# EAGLE board basic_sensor gpio_parallel_v1.2_3v3BOOST (EAGLE 8.1.1)
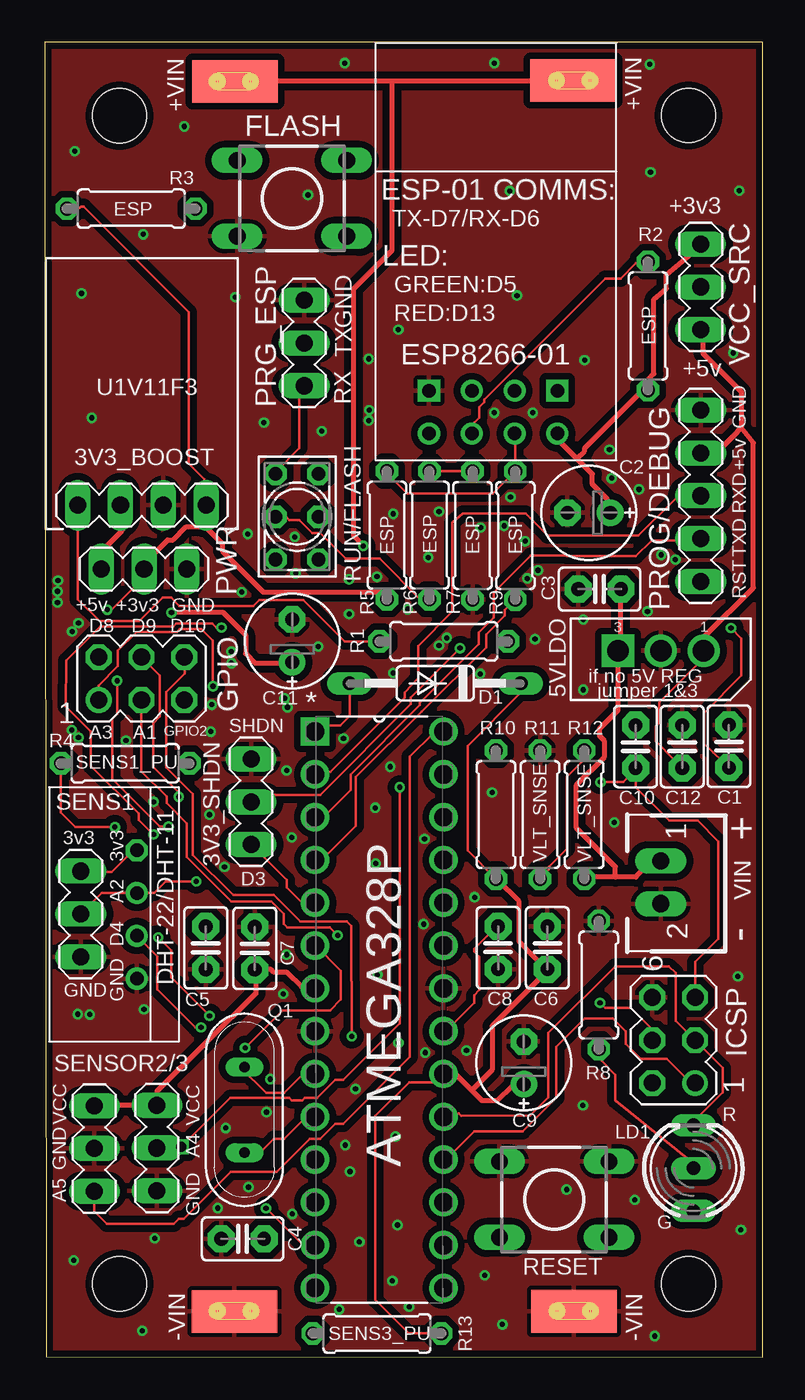
[diagram p0: board, top side]
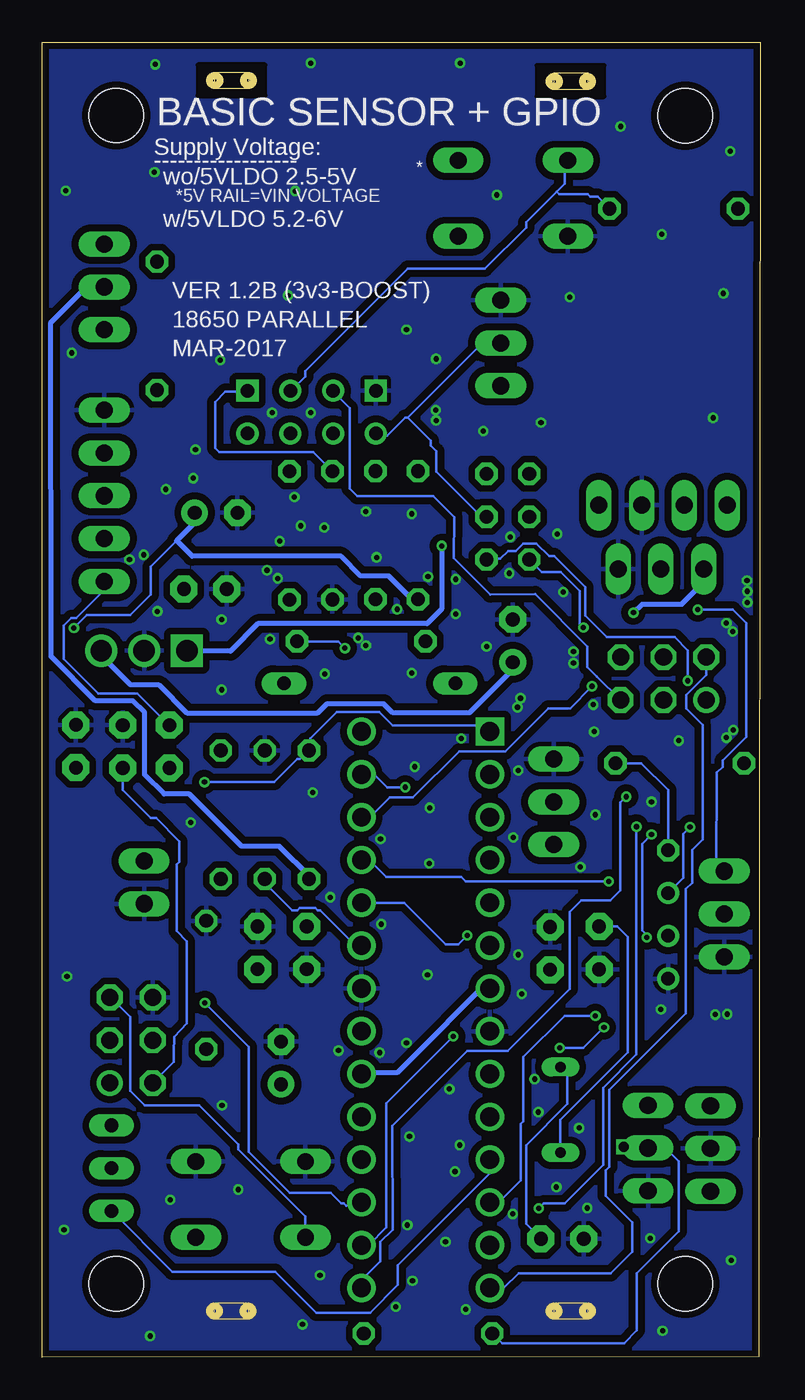
[diagram p1: board, bottom side, seen from below]

Size 42.6 x 78.05 mm. Coordinates in mm from the lower left corner, seen from the top.
Outline: 0.08,0.03 42.6,0 42.6,78.05 0,78.05 0.08,0.03
Copper layers (1*16): Top 0.035mm / dielectric 1.5mm / Bottom 0.035mm
Design rules "SeeedStudio_2layer_DRU_no_angle_20140221": minimum track width 6mil, minimum drill 12mil, track to track 6mil, track to pad 6mil, pad to pad 6mil, via to via 6mil, smd to smd 0mil, copper to edge 10mil, drill to drill 10mil, minimum pad ring 10mil, minimum via ring 6mil, stop-mask expansion 2mil, vias tented up to drill 100mil, thermal gap 10mil
Holes 3.2 mm at 38.2,4.37 4.44,73.69 38.2,73.71 4.44,4.37
Milling: area 10.2,2.2 to 12.2,3.2; area 30.4,2.2 to 32.4,3.2; area 30.4,75.3 to 32.4,76.3; area 10.2,75.2 to 12.2,76.2; area 9.9,75.4 to 10.5,76; area 11.9,75.4 to 12.5,76; area 30.1,75.5 to 30.6,76.1; area 32.1,75.5 to 32.6,76.1; area 32.1,2.5 to 32.7,3; area 30.1,2.5 to 30.7,3; area 9.9,2.5 to 10.5,3; area 12,2.5 to 12.5,3

## Footprints (pad centres in the part's own frame; a part is rotated, then mirrored left to right if it is on the bottom)
MA04-1 = drill 1.016 long: 1 -3.81,0; 2 -1.27,0; 3 1.27,0; 4 3.81,0
MA03-1 = drill 1.016 long: 1 -2.54,0; 2 0,0; 3 2.54,0
TO254P482X1024X3124-3P = drill 1.27 square: 1 -5.08,0.991 | drill 1.27: 2 -2.54,0.991; 3 0,0.991
SMD2,54-5,08 = smd 2.54 x 5.08: 1 0,0
DIP254P762X457-28 = drill 1.118 square: 1 -7.62,33.02 | drill 1.118: 2 -7.62,30.48; 3 -7.62,27.94; 4 -7.62,25.4; 5 -7.62,22.86; 6 -7.62,20.32; 7 -7.62,17.78; 8 -7.62,15.24; 9 -7.62,12.7; 10 -7.62,10.16; 11 -7.62,7.62; 12 -7.62,5.08; 13 -7.62,2.54; 14 -7.62,0; 15 0,0; 16 0,2.54; 17 0,5.08; 18 0,7.62; 19 0,10.16; 20 0,12.7; 21 0,15.24; 22 0,17.78; 23 0,20.32; 24 0,22.86; 25 0,25.4; 26 0,27.94; 27 0,30.48; 28 0,33.02
C2.5-2 = drill 0.813 pad 1.6 octagon: 1 -1.27,0; 2 1.27,0
E2,5-6E = drill 0.813 pad 1.575: + -1.27,0 | drill 0.813 pad 1.575 octagon: - 1.27,0
DO35-10 = drill 0.813 long: A 5.08,0; C -5.08,0
RHT03_DHT-22 = drill 0.8: DATA -1.27,0; GND 3.81,0; NULL 1.27,0 | drill 0.8 octagon: VDD -3.81,0
ESP01 = drill 0.8: CH_PD -1.285,-8.178; GPIO0 1.255,-5.638; GPIO2 -1.285,-5.638; RST 1.255,-8.178; TX -3.825,-8.178; VCC 3.795,-8.178 | drill 0.8 square: GND -3.825,-5.638; RX 3.795,-5.638
DTS-6 = drill 1 long: 1 -3.25,2.25; 2 3.25,2.25; 3 -3.25,-2.25; 4 3.25,-2.25
MA03-2 = drill 1.016: 1 -2.54,-1.27 | drill 1.016 octagon: 2 -2.54,1.27; 3 0,-1.27; 4 0,1.27; 5 2.54,-1.27; 6 2.54,1.27
DUOLED-C-5MM = drill 0.813 long: AR 2.54,0; AX -2.54,0; C 0,0
MA05-1 = drill 1.016 long: 1 -5.08,0; 2 -2.54,0; 3 0,0; 4 2.54,0; 5 5.08,0
QS = drill 0.61 long: 1 -2.54,0; 2 2.54,0
0207/7 = drill 0.813 octagon: 1 -3.81,0; 2 3.81,0
9450-2 = drill 0.813 octagon: 1 -2.54,-1.27; 2 0,-1.27; 3 2.54,-1.27; 4 -2.54,1.27; 5 0,1.27; 6 2.54,1.27
6410-02 = drill 1.016 long: 1 1.27,0.914; 2 -1.27,0.914

## Placement (x,y rotation side)
3V3_BOOST  POLOLU-U1V11F3  [MA04-1]  5.76,50.57 0 top
3V3_SHDN  [MA03-1]  12.24,32.97 270 top
5VLDO  MCP1826S-5002E/AB  [TO254P482X1024X3124-3P]  39.09,40.94 0 top
+L  WIREPADSMD2,54-5,08  [SMD2,54-5,08]  11.29,75.72 270 top
+R  WIREPADSMD2,54-5,08  [SMD2,54-5,08]  31.34,75.78 270 top
-L  WIREPADSMD2,54-5,08  [SMD2,54-5,08]  11.25,2.72 90 top
-R  WIREPADSMD2,54-5,08  [SMD2,54-5,08]  31.39,2.74 90 top
ATMEGA328P  ATMEGA328P-PU  [DIP254P762X457-28]  23.66,4.12 0 top
C1  .1uf  [C2.5-2]  40.59,36.27 270 top
C2  470uF  [E2,5-6E]  32.28,50.12 180 top
C3  4.7uf  [C2.5-2]  32.92,45.59 0 top
C4  18pf  [C2.5-2]  11.74,7.03 0 top
C5  18pf  [C2.5-2]  9.56,24.3 90 top
C6  .1uf  [C2.5-2]  29.82,24.31 270 top
C7  .1uf  [C2.5-2]  12.46,24.27 270 top
C8  .1uf  [C2.5-2]  26.9,24.31 90 top
C9  100uF  [E2,5-6E]  28.42,17.48 90 top
C10  .1uf  [C2.5-2]  35.05,36.25 90 top
C11  33uF  [E2,5-6E]  14.68,42.52 90 top
C12  1uf  [C2.5-2]  37.82,36.25 270 top
D1  1N4148DO35-10  [DO35-10]  23.16,40.01 180 top
DHT-22/DHT-11  DHT-22  [RHT03_DHT-22]  5.46,26.28 270 top
ESP1  ESP01  [ESP01]  26.62,63 0 top
FLASH  [DTS-6]  14.66,68.79 180 top
GPIO  [MA03-2]  5.74,40.28 0 top
ICSP  [MA03-2]  37.31,18.82 90 top
LD1  2.3v  [DUOLED-C-5MM]  38.48,11.23 90 top
PRG_ESP  [MA03-1]  15.39,60.2 90 top
PROG/DEBUG  [MA05-1]  38.91,51.13 270 top
PWR  [MA03-1]  5.89,46.79 0 top
Q1  8MHZ  [QS]  11.85,14.69 270 top
R1  4.7k  [0207/7]  23.67,42.49 180 top
R2  340  [0207/7]  35.79,61.21 270 top
R3  340  [0207/7]  5.13,68.17 0 top
R4  220  [0207/7]  4.77,35.26 0 top
R5  1K  [0207/7]  20.3,48.79 270 top
R6  1K  [0207/7]  22.82,48.79 90 top
R7  2.7K  [0207/7]  25.38,48.78 270 top
R8  220  [0207/7]  32.87,22.1 270 top
R9  0 ohm  [0207/7]  27.92,48.77 90 top
R10  10K  [0207/7]  26.77,32.21 270 top
R11  100k  [0207/7]  29.39,32.21 270 top
R12  300k  [0207/7]  32,32.21 270 top
R13  4.7  [0207/7]  19.71,1.42 0 top
RESET  DTS-6  [DTS-6]  30.22,9.37 180 top
RUN/FLASH  9450-2  [9450-2]  14.97,49.89 270 top
SENS1  [MA03-1]  2.13,26.31 270 top
SENSOR2  [MA03-1]  2.95,12.4 270 top
SENSOR3  [MA03-1]  6.65,12.42 270 top
VCC_SRC  [MA03-1]  38.91,63.53 270 top
VIN  PWR  [6410-02]  37.46,28.19 90 top

## Library data of the parts
3V3_BOOST 3V3_SHDN GPIO PRG_ESP PWR SENS1 SENSOR2 SENSOR3 VCC_SRC = my-custom-lib; OC_FARNELL: unknown; OC_NEWARK: unknown
5VLDO = Microchip_By_element14_Batch_1; MPN: MCP1826S-5002E/AB; OC_FARNELL: 1578425; OC_NEWARK: 08N6494; PACKAGE: TO-220-3; SUPPLIER: Microchip
+L +R -L -R = wirepad
ATMEGA328P = Atmel_By_element14_Batch_1-00; MPN: ATMEGA328P-PU; OC_FARNELL: 1715487; OC_NEWARK: 15R0268; PACKAGE: PDIP-28; SUPPLIER: Atmel
C1 C3-C8 C10 C12 = capacitor-wima
C2 C9 C11 R1-R13 = rcl
D1 = diode
DHT-22/DHT-11 = RHT03_DHT-22_AM2302; PROD_ID: SEN-10167
ESP1 = esp8266modules
FLASH RESET = switch-tact
ICSP PROG/DEBUG = con-lstb; OC_FARNELL: unknown; OC_NEWARK: unknown
LD1 = led
Q1 = special
RUN/FLASH = switch-misc
VIN = con-molex; OC_FARNELL: unknown; OC_NEWARK: unknown

## Nets
3V3_SDN_JMP: 3V3_SHDN.2 R1.1
3V3_SHUTDOWN: 3V3_BOOST.1 R1.2
+3V3: 3V3_BOOST.4 C1.2 C2.+ DHT-22/DHT-11.VDD ESP1.VCC PWR.2 R2.2 R3.1 R4.2 R5.2 SENS1.1 VCC_SRC.1
+4.1V: 5VLDO.1 +L.1 +R.1 C3.2 R12.2 VIN.1
+5V: 3V3_BOOST.2 5VLDO.3 C11.+ C12.2 ICSP.2 PROG/DEBUG.2 PWR.1 VCC_SRC.3
ESP-RXD-SW: PRG_ESP.1 RUN/FLASH.1
ESP_CH_PD: ESP1.CH_PD R2.1
ESP_GPIO0: ESP1.GPIO0 FLASH.4 R3.2
ESP_GPIO2: ESP1.GPIO2 GPIO.5
ESP_RST: ESP1.RST R5.1 R9.2
ESP_RXD: ESP1.RX R6.2 R7.1
ESP_RXD_VD: R6.1 RUN/FLASH.2
ESP_TXD: ESP1.TX PRG_ESP.2 RUN/FLASH.5
GND: 3V3_BOOST.3 3V3_SHDN.1 5VLDO.2 -L.1 -R.1 ATMEGA328P.8 ATMEGA328P.22 C1.1 C2.- C3.1 C4.1 C5.1 C6.1 C7.1 C8.1 C9.- C11.- C12.1 DHT-22/DHT-11.GND ESP1.GND FLASH.2 ICSP.6 PRG_ESP.3 PROG/DEBUG.1 PWR.3 R7.2 R8.1 R11.1 RESET.3 RESET.4 SENS1.3 SENSOR2.2 SENSOR3.3 VIN.2
MISO/D12: ATMEGA328P.18 ICSP.1
MOSI/D11: ATMEGA328P.17 ICSP.4
N$15: ATMEGA328P.21 C8.2
N$21: C10.2 PROG/DEBUG.5
N$30: LD1.C R8.2
PB0/D8: ATMEGA328P.14 GPIO.2
PB1/D9: ATMEGA328P.15 GPIO.4
PB2/D10: ATMEGA328P.16 GPIO.6
PC0/D14/A0: ATMEGA328P.23 R11.2 R12.1
PC1/D15/A1: ATMEGA328P.24 GPIO.3
PC2/D16/A2: ATMEGA328P.25 DHT-22/DHT-11.DATA R4.1 SENS1.2
PC3/D17/A3: ATMEGA328P.26 GPIO.1
PC4/D18/A4: ATMEGA328P.27 R13.1 SENSOR3.2
PC5/D19/A5: ATMEGA328P.28 SENSOR2.3
PD2/D2: ATMEGA328P.4 R9.1
PD3/D3: 3V3_SHDN.3 ATMEGA328P.5
PD4/D4: ATMEGA328P.6 DHT-22/DHT-11.NULL
PD5/D5: ATMEGA328P.11 LD1.AX
PD6/D6: ATMEGA328P.12 RUN/FLASH.3
PD7/D7: ATMEGA328P.13 RUN/FLASH.6
RESET: ATMEGA328P.1 C10.1 D1.A ICSP.5 R10.1 RESET.2
RXD: ATMEGA328P.2 PROG/DEBUG.3
SCK/D13: ATMEGA328P.19 ICSP.3 LD1.AR
TXD: ATMEGA328P.3 PROG/DEBUG.4
VCC_SRC: ATMEGA328P.7 ATMEGA328P.20 C6.2 C7.2 C9.+ D1.C R10.2 R13.2 SENSOR2.1 SENSOR3.1 VCC_SRC.2
XAL2/PB7: ATMEGA328P.10 C5.2 Q1.2
XTAL1/PB6: ATMEGA328P.9 C4.2 Q1.1

## Tracks (layer width: path | path; a pad name or v marks a point on that pad's centre or on a via)
3V3_SDN_JMP  (via drill 0.3)
  Top 0.152: 3V3_SHDN.2 12.65,33.38 16.33,33.38 21.72,38.76 21.72,39.17 v24.64,42.09
  Bottom 0.152: v24.64,42.09 25.04,42.49 R1.1
3V3_SHUTDOWN
  Top 0.152: R1.2 17.8,42.49 15.34,44.96 12.72,44.96 12.37,44.6 7.97,44.6 7.49,45.09 7.01,45.09 5.61,43.69 3.25,43.69 1.95,44.98 3V3_BOOST.1
+3V3  (via drill 0.3)
  Top 0.152: 30.5,54.71 ESP1.VCC | 33.4,50.14 C2.+ | 35.69,57.3 R2.2 35.84,57.45 | v40.72,43.28 41.32,42.67 41.32,40.46 39.12,38.23 39.12,36.4 39.65,35.89 40.23,35.36 C1.2 | DHT-22/DHT-11.VDD 5.36,30.02 5.05,29.72 4.9,29.72 3.99,28.8 2.18,28.8 SENS1.1 | R3.1 1.98,68.17 2.16,68.28 2.31,68.28 8.56,62.03 8.56,53.03 9.47,52.12 9.47,50.7 9.57,50.7 3V3_BOOST.4 | v3.71,44.37 3.96,44.37 5.89,46.3 PWR.2 5.89,46.81
  Top 0.305: 30.5,54.71 30.5,54.41 31.57,53.34 | 31.57,53.34 32.49,52.43 32.49,51.82 33.4,50.9 33.4,50.14 | 35.69,57.3 35.38,57.3 32.03,53.95 32.03,53.8 31.57,53.34 | 35.84,57.45 35.84,58.06 36.14,58.37 36.14,62.79 36.88,63.42 36.88,64.26 38.38,65.53 38.89,65.99 38.89,66.06 VCC_SRC.1 | 9.47,50.04 9.47,49.53 9.24,49.3 8.41,49.3 7.62,48.51 7.29,48.51 5.9,47.12 5.89,47.12 PWR.2 | 9.47,50.04 9.47,50.48 9.57,50.48 3V3_BOOST.4 | 9.47,50.04 9.63,49.89 9.63,49.23 10.54,48.31 10.54,47.85 12.98,45.41 19.87,45.41 R5.2
  Bottom 0.152: v40.72,43.28 39.95,44.04 37.36,44.04 36.14,45.26 36.14,46.94 34.62,48.46 | 33.55,49.99 C2.+ | v3.71,44.37 1.62,44.37 0.84,43.59 0.84,36.83 2.23,35.43 2.23,35.05 2.59,34.72 2.62,28.96 2.23,28.96 SENS1.1 | DHT-22/DHT-11.VDD 5.46,33.66 7.06,35.26 R4.2
  Bottom 0.305: 33.55,49.99 33.55,49.53 34.62,48.46 33.7,47.55 24.87,47.55 23.7,46.38 22.05,46.38 20.65,44.98 R5.2
+4.1V  (via drill 0.3)
  Top 0.152: 34.16,45.57 C3.2 | 34.01,42.06 5VLDO.1 | 32.03,28.5 R12.2 | 36.3,29.72 VIN.1 | 11.28,75.74 +L.1 | 31.27,75.74 +R.1
  Top 0.305: 34.16,45.57 34.16,42.21 34.01,42.06 | 33.86,28.5 35.08,28.5 36.3,29.72 | 33.86,28.5 32.03,28.5 | 5VLDO.1 34.01,38.41 32.92,37.31 32.92,36.88 33.22,36.58 33.22,35.64 31.55,33.96 31.55,31.42 33.86,29.11 33.86,28.5 | 31.27,75.74 20.6,75.74 | 20.6,75.74 11.28,75.74 | 20.6,75.74 20.6,65.68 18.31,63.4 18.31,48.77 v18.9,48.16
  Bottom 0.152: 34.01,41.91 5VLDO.1
  Bottom 0.305: 34.01,41.91 31.42,41.91 29.79,43.54 19.76,43.54 18.9,44.4 v18.9,48.16
+5V  (via drill 0.3)
  Top 0.152: 41.1,54.94 41.07,54.91 | 41.32,55.19 41.32,55.17 | 41.32,55.7 41.32,55.65 | 39.04,53.8 PROG/DEBUG.2 | C12.2 37.36,35.43 36.24,36.58 36.24,37.44 36.45,37.64 36.45,38.86 39.04,41.45 39.04,41.91 5VLDO.3 39.19,42.06
  Top 0.305: v7.52,44.2 10.59,44.2 11.91,42.88 11.91,41.76 12.47,41.2 14.58,41.2 C11.+ | 39.04,53.8 39.95,53.8 41.07,54.91 | 41.1,54.94 41.32,55.17 42.04,54.28 42.04,45.67 39.19,42.82 39.19,42.06 | 41.32,55.65 41.32,55.19 | 41.32,55.7 41.32,57.3 39.04,59.59 39.04,60.81 38.89,60.96 38.89,60.98 VCC_SRC.3 | PWR.1 3.35,47.83 3.36,47.83 4.6,49.07 4.6,50.57 3V3_BOOST.2
  Bottom 0.152: ICSP.2 34.8,17.53 34.8,18.11 34.77,19.02 34.01,19.81 34.01,24.69 34.62,25.3 34.62,29.26 34.47,29.41 34.47,30.63 35.84,32 36.14,32 37.82,33.68 C12.2 | 39.04,41.6 39.04,41.91 5VLDO.3
  Bottom 0.305: v7.52,44.2 7.01,44.7 4.65,44.7 4.14,45.21 3.35,46.01 PWR.1 | 39.04,41.6 37.36,39.93 35.69,39.93 34.01,38.25 26.24,38.25 25.7,38.79 22.33,38.79 21.79,38.25 17.25,38.25 14.71,40.79 C11.+
ESP-RXD-SW
  Top 0.152: RUN/FLASH.1 13.74,52.58 15.11,53.95 15.11,57.45 15.26,57.61 15.26,57.66 PRG_ESP.1
ESP_CH_PD
  Top 0.152: ESP1.CH_PD 25.48,54.86 25.48,55.47 25.78,55.78 25.78,56.39 26.08,56.69 26.08,56.84 33.25,64.01 34.16,64.01 35.08,64.92 35.69,64.92 R2.1
ESP_GPIO0
  Bottom 0.152: 12.06,69.19 11.61,69.65 11.61,70.87 11.45,71.02 FLASH.4 | 12.06,69.19 13.89,67.36 13.89,67.06 16.33,64.62 20.9,64.62 27,58.52 27,58.22 27.76,57.45 ESP1.GPIO0 | 12.06,69.19 11.91,69.04 10.24,69.04 10.08,68.89 9.65,68.89 R3.2
ESP_GPIO2
  Bottom 0.152: ESP1.GPIO2 25.32,57.3 24.36,56.34 24.36,51.56 23.9,51.1 19.4,51.1 18.16,49.86 18.19,47.42 16,45.26 13.33,45.29 10.26,42.19 10.26,41.07 10.27,40.97 9.7,40.41 GPIO.5
ESP_RST
  Top 0.152: 27.91,54.71 ESP1.RST 27.92,54.78 R9.2 26.59,51.26 21.51,51.26 20.3,52.47 R5.1
ESP_RXD
  Top 0.152: R6.2 23.72,52.6 25.37,52.6 R7.1
  Bottom 0.152: ESP1.RX 30.5,57.3 31.72,57.3 32.33,56.69 32.33,53.95 32.1,53.72 26.51,53.72 R7.1
ESP_RXD_VD
  Top 0.152: RUN/FLASH.2 13.74,49.84 14.35,49.84 14.5,49.68 15.11,49.68 15.87,48.92 16.33,48.92 17.86,47.4 19.86,47.4 22.27,44.98 R6.1
ESP_TXD
  Bottom 0.152: ESP1.TX 22.73,54.71 22.12,54.71 21.06,55.78 20.9,55.78 | RUN/FLASH.5 16.33,49.99 16.64,49.99 19.23,52.58 19.23,53.8 19.53,54.1 19.53,54.41 20.9,55.78 | 15.57,60.05 16.64,60.05 20.9,55.78 | 15.57,60.05 15.42,60.05 | PRG_ESP.2 15.57,60.2 15.57,60.05
GND  (via drill 0.3 pad 0.25)
  other vias: 28.02,63.02 1.78,71.58 8.28,73.05 17.8,76.81 26.67,76.81 27.58,69.22 35.89,76.73 35.94,70.33 15.62,68.99 5.84,66.65 2.18,63.14 2.79,55.75 11.3,62.92 20.98,60.99 16.43,54.97 13,55.47 32.03,59.18 16.23,42.19 40.84,59.61 41.2,69.24 31.95,39.62 31.95,43.79 22.76,47.47 26.54,33.53 1.6,37.24 0.76,44.81 25.5,27.3 19.73,22.71 18.06,44.12 1.95,20.37 1.73,5.77 20.8,13.11 18.44,15.93 5.79,1.57 20.93,7.85 36.19,1.27 41.3,7.57 41.12,22.61 33.78,31.75 31.93,14.96 30.96,9.96 26.11,4.88 19.63,29.31 20.5,35.05 14.65,30.86 2.01,43.59 0.76,45.47 0.79,46.1 1.62,43.08 2.01,36.78 11.07,41.88 9.9,38.73 11.07,41.2 9.85,37.13 11.68,45.42 14.88,46.53 14.83,48.69 14.22,39.12 14.4,38.58 17.73,36.73 20.67,40.61 14.35,34.82 19.61,32.61 2.67,20.35 29.08,42.62 25.83,40.56 21.54,44.4 19.71,46.33 12.04,48.87 19.25,56.21 19.23,55.6 23.85,42.7 18.06,46.18 23.39,42.24 28.62,46.23 29.26,46.71 25.86,49.25 27.25,49.35 28.5,48.44 27.63,51.05 23.39,50.19 20.67,50.06 33.63,52.17 35.25,51.51 33.5,53.87 28.96,56.06 26.67,56.06 19.23,59.26 35.76,44.27 37.41,47.35 36.58,47.62 18.67,6.86 4.82,36.6 6.45,32.97 9.78,32.21 14.15,21.56 25.02,18.21 10.74,13.61 5.89,20.65 12.09,10.11 10.26,8.86 14.68,8.51 20.98,18.67 14.35,23.9 10.67,29.11 22.53,30.76 22.48,25.7 22.58,18.08 13.38,16.51 13.16,14.55 20.62,4.55 27.15,1.96 35,9.35 6.53,7.06 17.47,2.84 21.61,3 17.83,12.6 18.11,11.02
  pour Top (isolate 0.406): 0.18,0.15 0.13,77.91 42.47,77.91 42.47,0.15
  pour Bottom (isolate 0.406): 0.18,0.15 0.13,77.91 42.47,77.91 42.47,0.15
  cutout Bottom: 9.27,76.66 13.23,76.66 13.23,74.83 9.27,74.83
  cutout Bottom: 29.39,76.71 33.35,76.71 33.35,74.88 29.39,74.88
MISO/D12
  Top 0.152: ICSP.1 38.23,16.38 36.91,17.7 35.36,17.7 34.47,18.59 34.47,19.36 33.7,20.12 32.03,20.12 30.35,18.44 30.35,15.39 28.37,13.41 25.48,13.41 23.8,11.73 ATMEGA328P.18
MOSI/D11  (via drill 0.3)
  Top 0.152: v32.94,21.03 33.25,20.73 34.77,20.73 36.02,19.48 36.02,18.85 ICSP.4
  Bottom 0.152: v32.94,21.03 30.35,18.44 30.35,12.19 27.91,9.75 25.48,9.75 24.87,9.14 24.71,9.14 24.56,8.99 24.41,9.14 23.8,9.14 ATMEGA328P.17
N$15
  Top 0.152: C8.2 26.85,25.45 26.54,25.15 26.39,25.15 25.48,24.23 25.48,24.08 25.78,23.77 25.78,21.79 25.48,21.49 25.48,21.03 23.8,19.36 ATMEGA328P.21
N$21
  Bottom 0.152: PROG/DEBUG.5 39.04,46.02 39.04,45.41 40.56,43.89 40.87,43.89 41.32,43.43 41.32,41.45 39.27,39.39 36.96,39.39 35.1,37.57 C10.2
N$30
  Top 0.152: LD1.C 38.45,11.56 33.86,15.27 33.86,16.76 32.94,17.68 32.94,18.29 R8.2
PB0/D8
  Bottom 0.152: ATMEGA328P.14 15.21,4.12 14.32,5 8.86,5 7.59,6.27 7.59,8 9.17,9.58 9.17,11.1 8.97,11.3 8.97,15.88 4.42,20.42 4.42,27.79 4.04,28.17 4.04,30.1 3.4,30.73 3.4,37.52 4.39,38.51 4.39,39.29 3.2,40.49 GPIO.2
PB1/D9  (via drill 0.3)
  Top 0.152: v7.95,33.27 7.95,33.53 6.43,35.05 6.43,37.62 6.83,38.02 6.83,40.46 GPIO.4
  Bottom 0.152: ATMEGA328P.15 23.66,4.59 22.53,5.71 22.53,6.86 21.79,7.57 21.82,13.74 17.37,18.19 14.99,18.19 11.3,21.87 11.3,26.44 10.62,27.13 8.89,27.13 8.3,27.71 8.3,32.92 v7.95,33.27
PB2/D10  (via drill 0.3)
  Top 0.152: v18.21,19.05 18.19,25.6 17.93,25.86 15.16,25.86 13.59,27.43 11.18,27.43 8.79,29.82 8.79,33.43 7.21,35 7.21,39.5 8.3,40.59 8.3,41.53 GPIO.6
  Bottom 0.152: ATMEGA328P.16 23.24,6.66 22.17,7.72 22.2,15.06 v18.21,19.05
PC0/D14/A0
  Top 0.152: R11.2 29.44,28.5 29.89,28.96 29.89,29.11 30.96,30.18 30.96,34.44 31.88,35.36 31.88,35.97 R12.1
  Bottom 0.152: ATMEGA328P.23 23.8,24.54 24.1,24.54 26.08,26.52 26.24,26.52 26.39,26.67 27.3,26.67 27.46,26.52 27.76,26.52 29.29,28.04 29.29,28.35 R11.2
PC1/D15/A1  (via drill 0.3)
  Top 0.152: v17.37,25.04 16.92,25.53 14.38,25.53 14.17,25.73 14.17,26.31 13.44,27.05 11.07,27.05 8.43,29.69 8.43,31.7 7.24,32.89 7.24,33.27 5.74,34.77 GPIO.3
  Bottom 0.152: ATMEGA328P.24 21.11,26.98 18.64,24.51 17.91,24.51 v17.37,25.04
PC2/D16/A2  (via drill 0.3)
  Top 0.152: v4.16,31.47 1.8,31.47 0.94,32.33 0.94,35.23 R4.1 | v8.99,28.25 7.19,28.25 6.5,27.55 DHT-22/DHT-11.DATA 3.37,27.55 SENS1.2
  Bottom 0.152: v4.16,31.47 4.57,31.06 4.57,28.45 DHT-22/DHT-11.DATA | ATMEGA328P.25 23.19,29.52 22.17,28.5 17.73,28.5 17.47,28.25 v8.99,28.25
PC3/D17/A3  (via drill 0.3)
  Top 0.152: v9.98,39.83 9.98,42.55 9.3,43.23 8,43.23 7.82,43.05 5.46,43.05 4.34,41.94 4.34,41.07 4.34,41.02 3.2,39.88 GPIO.1
  Bottom 0.152: ATMEGA328P.26 23.65,32.16 23.04,32.16 21.97,33.22 20.6,33.22 17.86,35.97 15.11,35.97 12.57,38.51 11.28,38.51 v9.98,39.83
PC4/D18/A4  (via drill 0.3, 0.6)
  Top 0.152: v21.06,33.83 21.06,19.81 17.7,16.46 17.25,16.46 16.18,15.39 15.42,15.39 15.26,15.24 14.65,15.24 14.5,15.39 11,15.39 v8.1,12.5 6.58,12.5 SENSOR3.2
  Bottom 0.152: v21.06,33.83 22.12,33.83 22.88,34.59 23.65,34.59 ATMEGA328P.27 | v8.1,12.5 5.69,12.5 4.83,11.63 4.83,7.49 7.31,5 7.31,1.6 8.08,0.84 15.32,0.84 R13.1
PC5/D19/A5
  Top 0.152: ATMEGA328P.28 23.65,37.03 23.04,37.03 21.67,35.66 21.67,17.83 17.7,13.87 17.25,13.87 16.33,12.95 15.72,12.95 13.77,11 11.02,11 8.25,8.23 7.95,8.23 7.64,7.92 3.68,7.92 2.95,8.66 SENSOR2.3
PD2/D2
  Top 0.152: ATMEGA328P.4 16.18,29.57 16.48,29.57 18.46,31.55 18.46,34.44 22.38,38.33 26.19,42.14 26.19,42.9 27.3,44.02 27.3,44.35 R9.1
PD3/D3
  Top 0.152: ATMEGA328P.5 16.03,26.97 15.26,26.97 14.35,27.89 14.35,28.32 3V3_SHDN.3
PD4/D4  (via drill 0.3)
  Top 0.152: ATMEGA328P.6 16.07,24.44 17.58,22.94 17.58,21.23 16.94,20.6 14.12,20.6 v11.89,18.36 | v9.27,19.58 8.94,19.58 6.68,21.84 6.68,23.8 DHT-22/DHT-11.NULL
  Bottom 0.152: v11.89,18.36 10.49,18.36 v9.27,19.58
PD5/D5
  Bottom 0.152: ATMEGA328P.11 16.04,10.91 21.49,5.46 21.49,4.29 23.14,2.64 26.34,2.64 28.78,5.08 34.87,5.08 LD1.AX
PD6/D6  (via drill 0.3)
  Top 0.152: v10.49,43.31 10.18,43.31 9.93,43.56 7.8,43.56 7.62,43.38 3.3,43.38 1.27,41.35 1.24,38.63 2.74,37.13 2.74,35.1 5.59,32.28 5.59,31.9 v6.45,31.04 | v6.73,24.92 7.49,24.16 7.49,22.55 v9.78,20.27
  Bottom 0.152: v10.49,43.31 10.69,43.48 10.69,45.47 11.84,46.61 12.95,46.61 13.59,47.24 RUN/FLASH.3 | v6.73,24.92 6.73,25.04 7.01,25.32 7.01,30.48 v6.45,31.04 | v9.78,20.27 11.61,20.27 14.05,17.83 14.05,14.02 14.2,13.87 14.2,10.52 15.42,9.3 16.03,9.3 ATMEGA328P.12
PD7/D7  (via drill 0.3)
  Top 0.152: v4.29,40.16 4.29,38.18 4.01,37.9 4.01,34.31 6.83,31.5 v7.34,31.5 | v13.13,8.84 15.26,6.71 16.03,6.71 ATMEGA328P.13
  Bottom 0.152: v4.29,40.16 4.29,41.96 5.08,42.75 9.12,42.75 10.39,44.02 10.39,45.72 12.22,47.55 12.52,47.55 13.28,48.31 14.05,48.31 14.5,47.85 14.96,47.85 15.42,47.4 16.18,47.4 RUN/FLASH.6 | v7.34,31.5 7.34,17.98 9.32,16 9.32,11.43 11.61,9.14 12.83,9.14 v13.13,8.84
RESET  (via drill 0.3)
  Top 0.152: ICSP.5 38.58,23.47 39.95,24.84 39.95,30.63 38.73,31.85 37.06,31.85 35.08,33.83 C10.1 35.08,34.95 34.31,34.14 v32.97,34.14 | D1.A 18.08,38.05 17.53,37.49 16.39,37.49 ATMEGA328P.1
  Bottom 0.152: ATMEGA328P.1 16.18,37.19 16.48,37.49 21.79,37.49 22.61,38.3 25.12,38.3 26.69,36.73 26.69,36.12 R10.1 26.85,35.97 27.3,35.51 27.46,35.51 28.83,34.14 v32.97,34.14 | RESET.2 27,7.16 27,8.38 30.96,12.34 30.96,12.65 33.27,14.96 36.5,14.96 37.36,15.82 37.36,20.19 38.25,21.11 38.58,21.41 ICSP.5
RXD
  Top 0.152: PROG/DEBUG.3 38.89,51.05 37.51,51.05 35.2,48.77 29.84,48.77 28.52,50.09 24.79,50.09 24.18,49.55 24.18,44.27 22.15,42.21 22.15,40.31 21.36,39.47 21.36,39.17 16.94,34.75 16.18,34.75 ATMEGA328P.2
SCK/D13
  Top 0.152: ATMEGA328P.19 23.8,14.33 24.41,14.33 24.56,14.48 24.71,14.33 28.8,14.35 29.87,15.44 29.87,19.25 33.83,23.22 37.03,23.22 37.44,22.81 37.44,19.96 ICSP.3 40.23,17.17 40.23,15.72 38.48,13.97 LD1.AR
TXD
  Top 0.152: PROG/DEBUG.4 38.89,48.46 36.02,48.46 35.99,48.44 35.08,47.55 30.96,47.55 30.94,47.57 28.83,47.57 26.64,45.39 26.64,43.92 25.75,43.03 25.75,42.34 22.25,38.84 22.25,38.71 18.16,34.59 18.16,33.68 16.64,32.16 16.18,32.16 ATMEGA328P.3
VCC_SRC
  Top 0.152: 12.52,23.01 C7.2 12.52,22.86 | 16.03,21.95 ATMEGA328P.7 | 28.37,16.15 C9.+ | 23.8,16.76 ATMEGA328P.20 23.17,16.33 21.61,16.33 19.61,14.33 19.61,3.4 21.59,1.42 R13.2 | 26.85,28.35 R10.2 25.09,30.07 25.09,36.3 28.24,39.45 D1.C | 29.74,23.01 C6.2 29.89,23.01
  Top 0.305: 12.52,23.01 13.44,23.01 13.59,22.86 14.35,22.86 15.26,21.95 16.03,21.95 | 12.52,22.86 12.52,21.59 6.65,15.8 SENSOR3.1 2.95,14.96 SENSOR2.1 | 28.37,16.15 27.76,16.15 26.85,15.24 25.93,15.24 25.32,15.85 | 25.32,15.85 24.41,16.76 23.8,16.76 | 26.85,28.35 28.14,27.05 28.14,24.69 29.74,23.01 | 25.32,15.85 26.54,17.07 26.54,19.66 29.89,23.01
  Bottom 0.152: 26.69,28.5 R10.2 | 23.65,16.92 ATMEGA328P.20
  Bottom 0.305: 26.69,28.5 28.52,30.33 30.76,30.33 33.86,33.43 35.36,33.43 36.52,34.57 36.52,38.28 37.21,38.96 39.45,38.96 42.06,41.58 42.09,61.42 40.11,63.4 38.89,63.4 38.89,63.53 VCC_SRC.2 | 23.65,16.92 21.49,16.92 20.45,17.98 16.64,21.79 16.18,21.79 ATMEGA328P.7
XAL2/PB7
  Top 0.152: Q1.2 11.61,12.19 12.83,12.19 13.59,12.95 14.2,12.95 15.42,14.17 16.03,14.17 ATMEGA328P.10
  Bottom 0.152: 9.63,25.6 C5.2 8.47,25.57 7.85,24.94 7.85,18.11 11.86,14.1 11.86,12.17 Q1.2
XTAL1/PB6
  Top 0.152: Q1.1 11.61,17.22 13.13,15.7 14.2,15.7 15.26,16.76 16.03,16.76 ATMEGA328P.9 16.18,16.76
  Bottom 0.152: Q1.1 11.45,17.22 11.45,15.04 13.89,12.57 13.89,7.91 C4.2

## Text on the board
tPlace: +VIN | +VIN | ESP | ESP-01 COMMS: | +3v3 | TX-D7/RX-D6 | LED: | GND | GREEN:D5 | ESP | TX | RED:D13 | ESP8266-01 | +5v | U1V11F3 | RX | GND | +5v | ESP | ESP | ESP | ESP | RXD | TXD | RST | +5v | D8 | +3v3 | D9 | GND | D10 | 3 | 1 | if no 5V REG | jumper 1&3 | A3 | A1 | GPIO2 | SHDN | SENS1_PU | VLT_SNSE | VLT_SNSE | 3v3 | 3v3 | + | A2 | D3 | D4 | - | GND | GND | SENSOR2/3 | VCC | VCC | R | GND | A4 | GND | A5 | G | -VIN | SENS3_PU | -VIN
bPlace: BASIC SENSOR + GPIO | Supply Voltage: | * | ------------------ | wo/5VLDO 2.5-5V | *5V RAIL=VIN VOLTAGE | w/5VLDO 5.2-6V | VER 1.2B (3v3-BOOST) | 18650 PARALLEL | MAR-2017